# Altium PCB led_project.PcbDoc (part 1 of 2)
Units mm, origin at the board's own origin, x right, y up, seen from the top; angles counter-clockwise.
Board outline 347.39 x 342.47 mm, 2 copper layers (Top Layer 1, Bottom Layer 1); 228 components, 175 nets, 826 pads, 0 vias.
Unrouted connection lines stored in the file: 396.
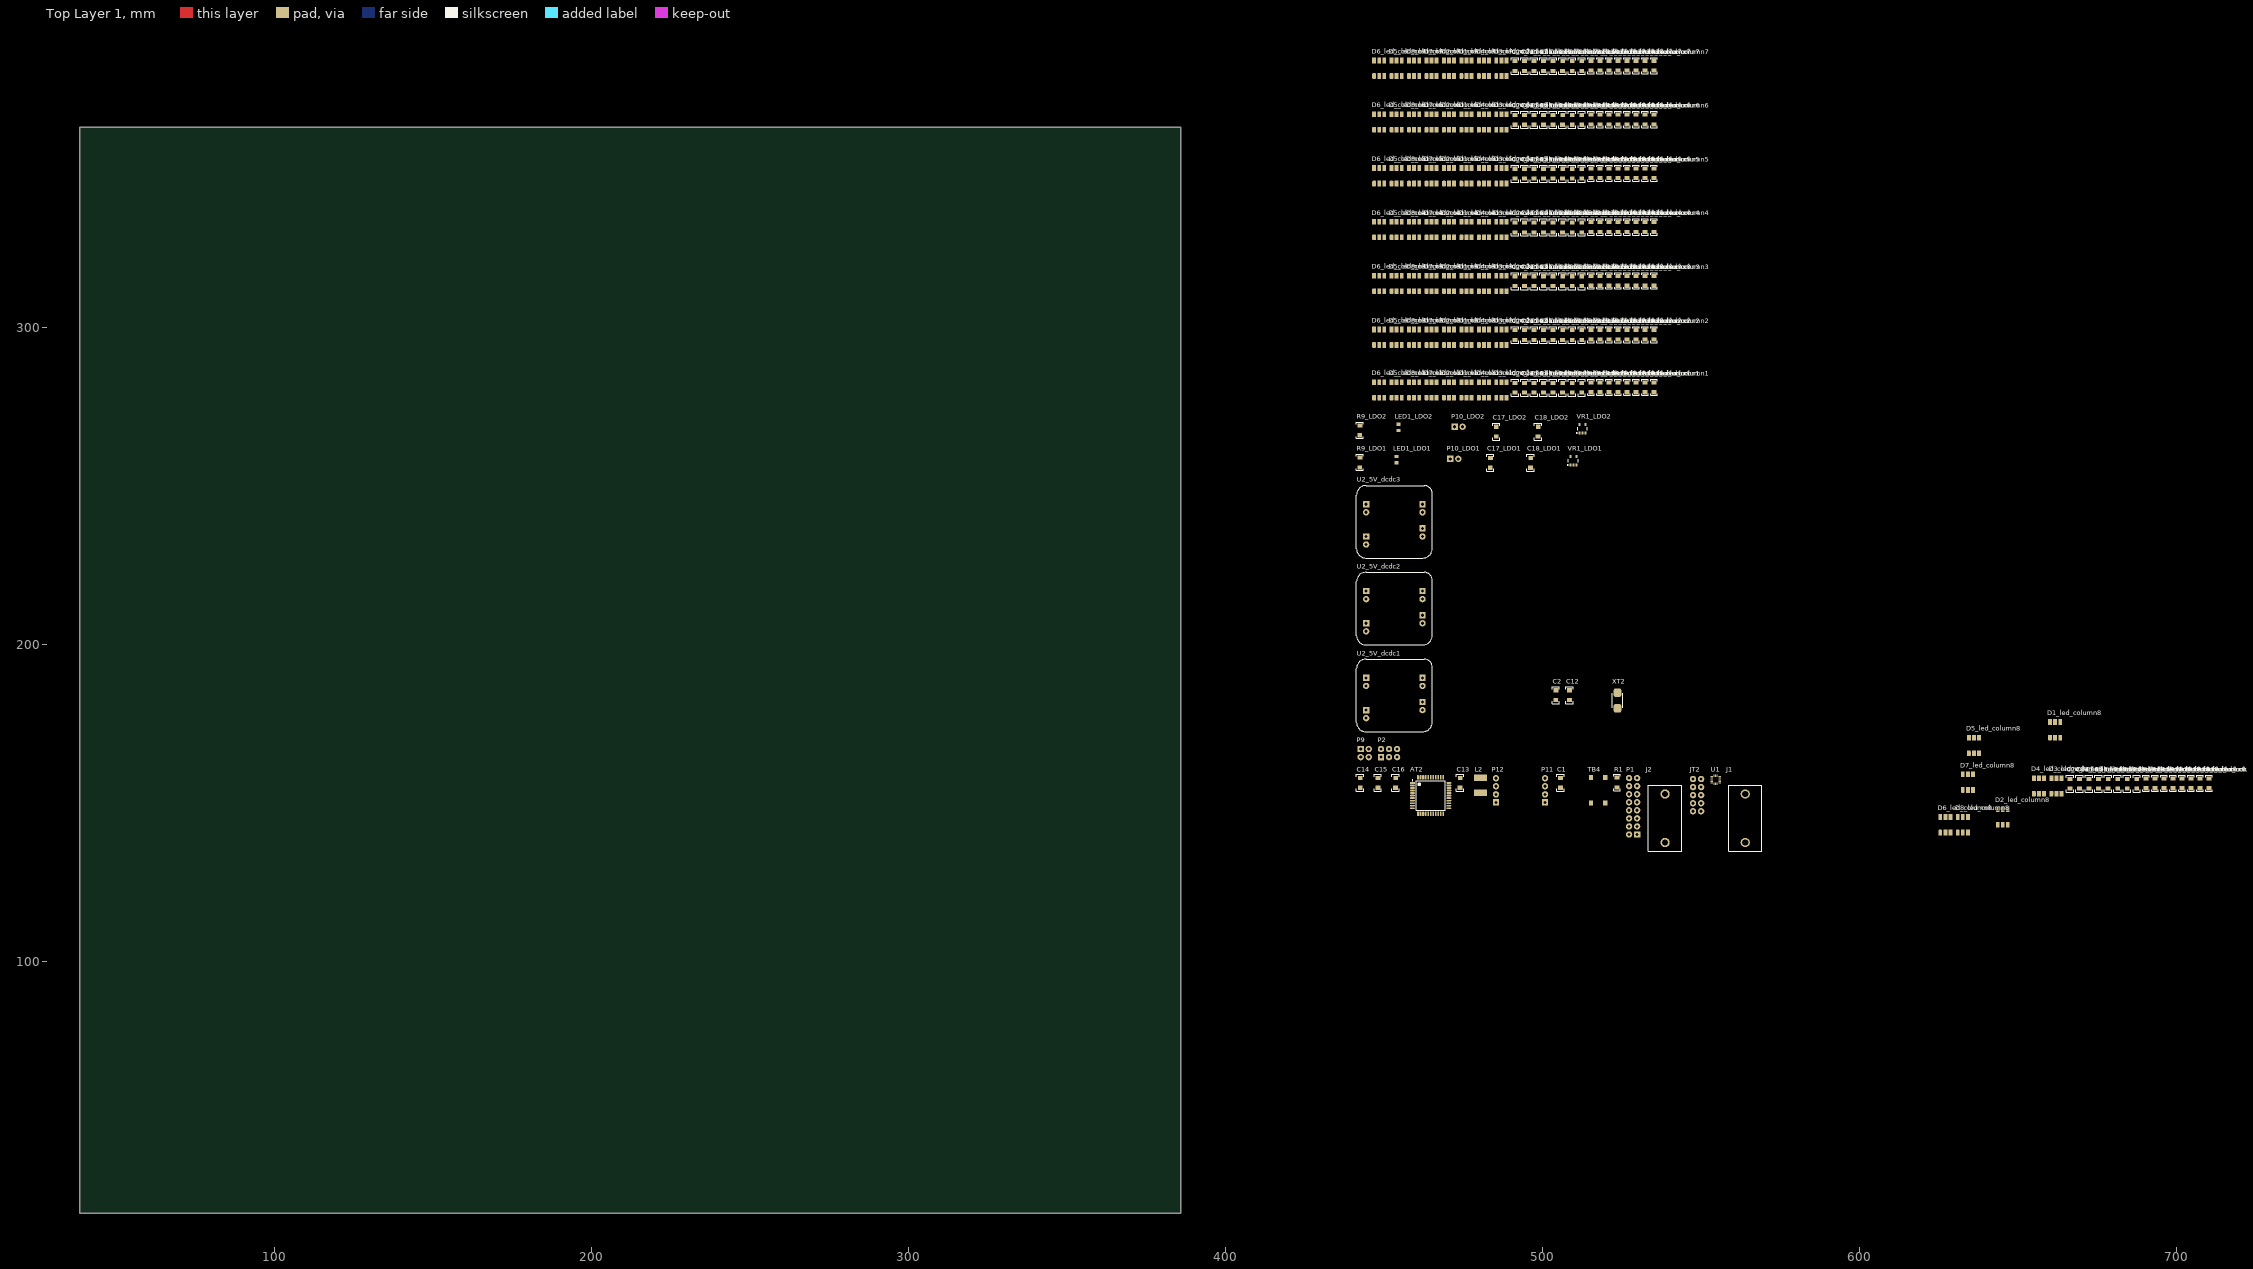
[diagram p0: Top Layer 1 view]
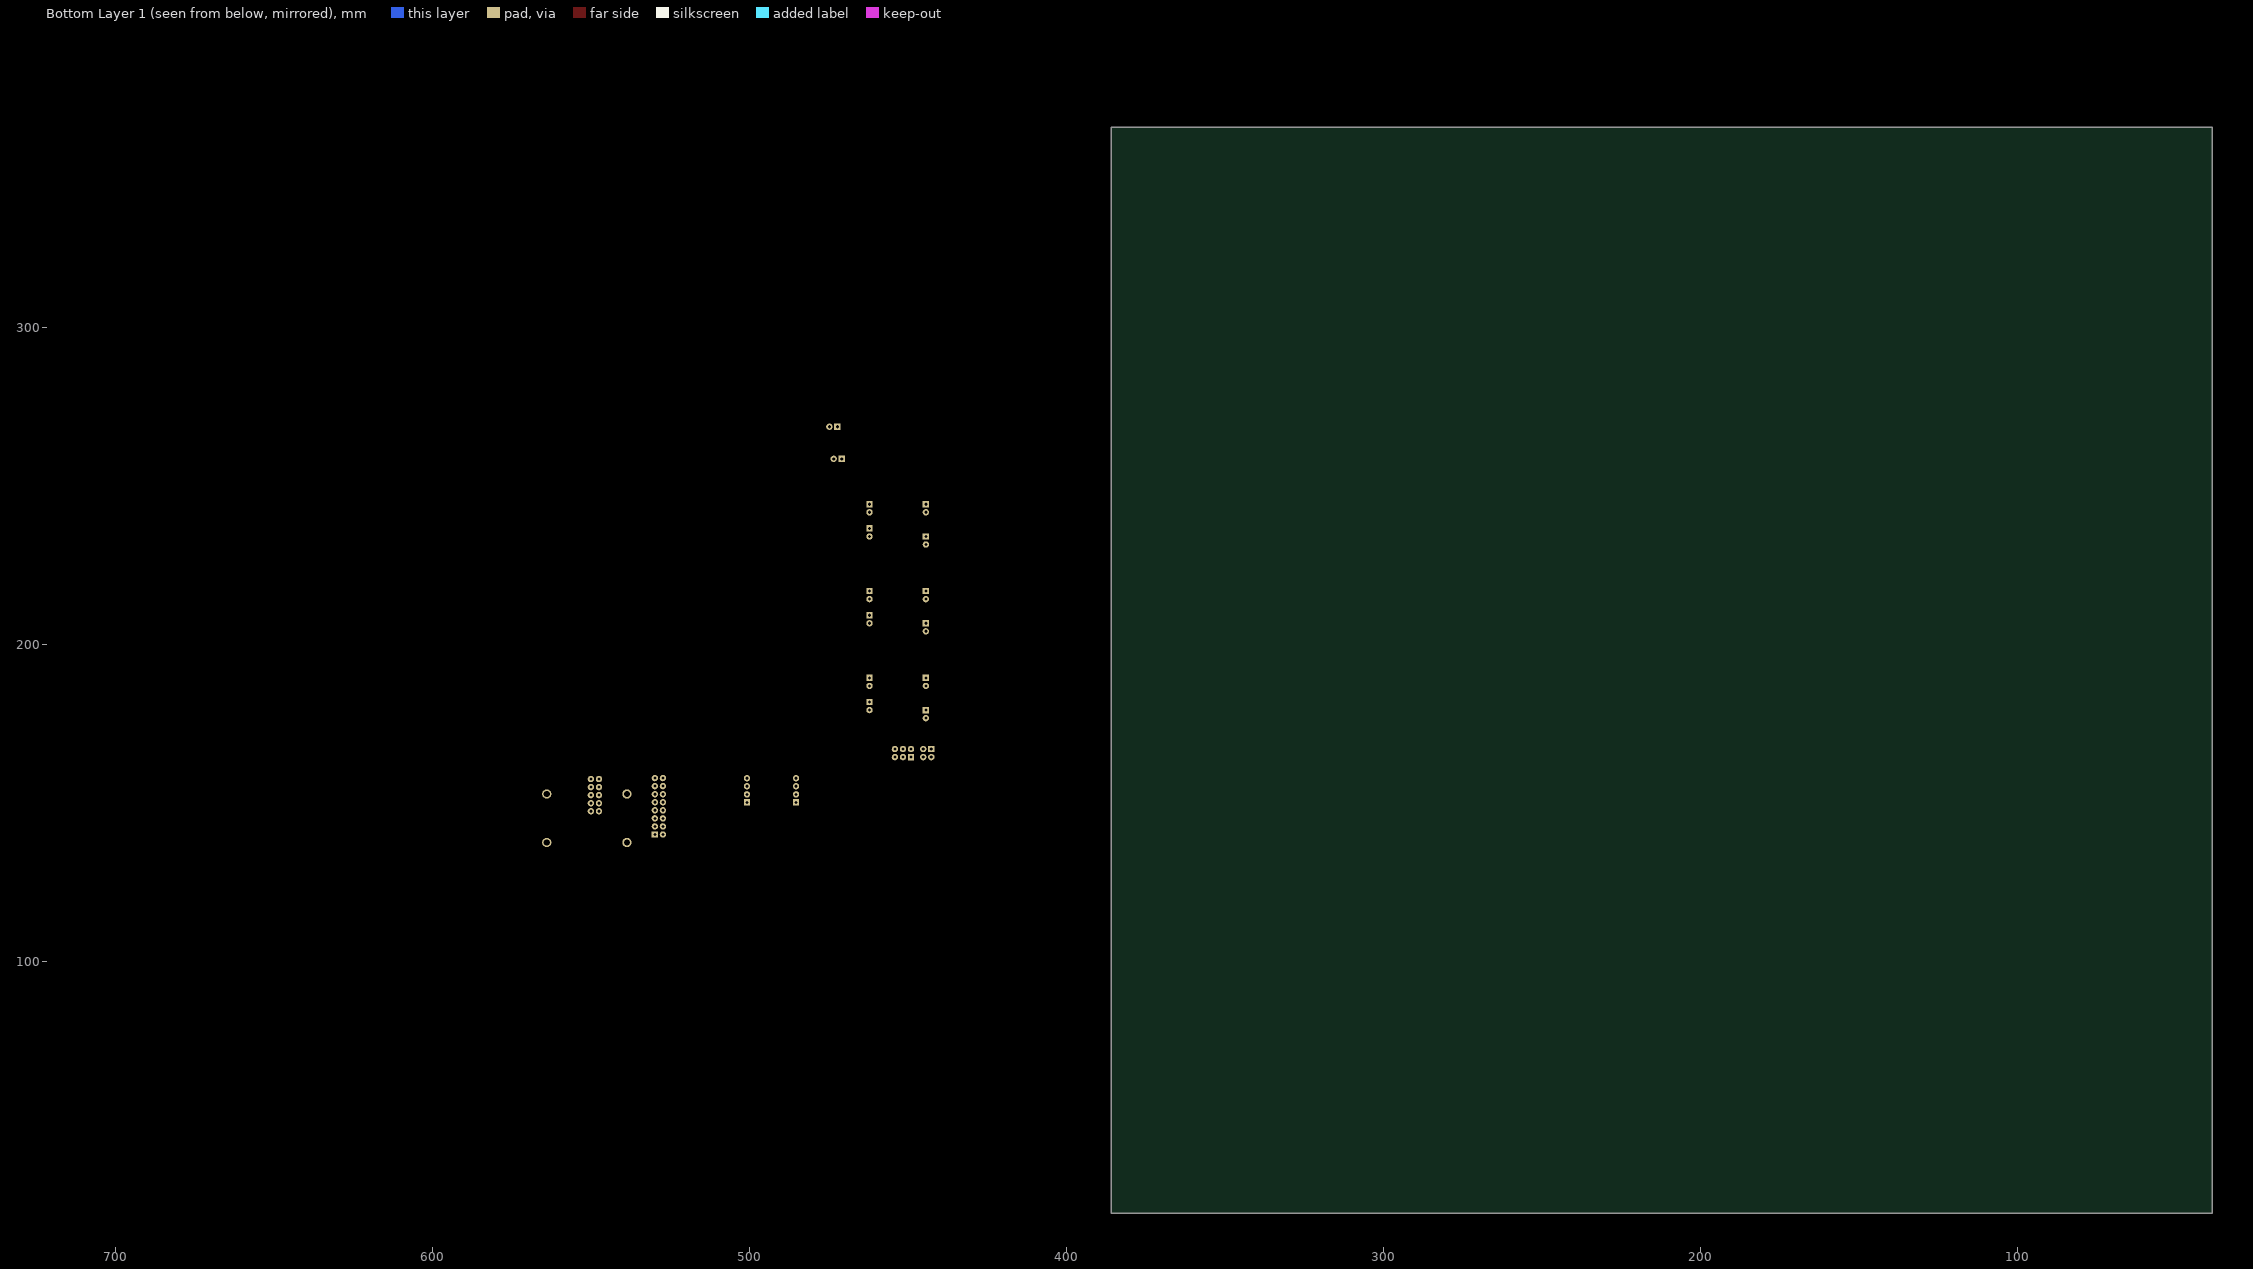
[diagram p1: Bottom Layer 1 view, seen from below]

## Layer stack, top to bottom
Top Solder: solder mask 0.0102, Solder Resist, Dk 3.5
Top Layer 1: signal copper 0.035
Dielectric 1: dielectric 0.32, FR-4, Dk 4.8
Bottom Layer 1: signal copper 0.035
Bottom Solder: solder mask 0.0102, Solder Resist, Dk 3.5

## Board outline
38.5,20.563 38.5,363 385.894,363 385.894,20.529 38.629,20.529

## Design rules (kind name [scope] priority, off if disabled: settings)
Clearance [All] p1: gap=0.25 ignorepadtopadclearanceinfootprint=FALSE except(0.001: Fill-Text Poly-Text Region-Text)
MinimumSolderMaskSliver [All] p1 off: minsoldermaskwidth=0.254
PolygonConnect PolygonConnect_1 [IsVia] p1: connectstyle=Direct reliefconductorwidth=0.254 reliefentries=4 polygonreliefangle="90 Angle" airgapwidth=0.254
PolygonConnect [All] p2: connectstyle=Relief reliefconductorwidth=0.254 reliefentries=4 polygonreliefangle="90 Angle" airgapwidth=0.254
RoomDefinition U_pwr_supply [InComponentClass('U_pwr_supply')] p1: confinementstyle=ConfineIn formatcopy=TRUE lockcomponents=FALSE outline 441.014,162.902 455.467,162.902 455.467,170.89 441.014,170.89
RoomDefinition led_column8 [InComponentClass('led_column8')] p2: confinementstyle=ConfineIn formatcopy=TRUE lockcomponents=FALSE outline 621.5,123.584 720.915,123.584 720.915,184.429 621.5,184.429
RoomDefinition led_column7 [InComponentClass('led_column7')] p3: confinementstyle=ConfineIn formatcopy=TRUE lockcomponents=FALSE outline 441.014,375.729 545.853,375.729 545.853,390.41 441.014,390.41
RoomDefinition led_column6 [InComponentClass('led_column6')] p4: confinementstyle=ConfineIn formatcopy=TRUE lockcomponents=FALSE outline 441.014,358.761 545.853,358.761 545.853,373.443 441.014,373.443
RoomDefinition led_column5 [InComponentClass('led_column5')] p5: confinementstyle=ConfineIn formatcopy=TRUE lockcomponents=FALSE outline 441.014,341.794 545.853,341.794 545.853,356.475 441.014,356.475
RoomDefinition led_column4 [InComponentClass('led_column4')] p6: confinementstyle=ConfineIn formatcopy=TRUE lockcomponents=FALSE outline 441.014,324.827 545.853,324.827 545.853,339.508 441.014,339.508
RoomDefinition led_column3 [InComponentClass('led_column3')] p7: confinementstyle=ConfineIn formatcopy=TRUE lockcomponents=FALSE outline 441.014,307.86 545.853,307.86 545.853,322.541 441.014,322.541
RoomDefinition led_column2 [InComponentClass('led_column2')] p8: confinementstyle=ConfineIn formatcopy=TRUE lockcomponents=FALSE outline 441.014,290.893 545.853,290.893 545.853,305.574 441.014,305.574
RoomDefinition led_column1 [InComponentClass('led_column1')] p9: confinementstyle=ConfineIn formatcopy=TRUE lockcomponents=FALSE outline 441.014,274.256 545.853,274.256 545.853,288.937 441.014,288.937
RoomDefinition LDO2 [InComponentClass('LDO2')] p10: confinementstyle=ConfineIn formatcopy=TRUE lockcomponents=FALSE outline 441.014,264.121 522.536,264.121 522.536,272.986 441.014,272.986
RoomDefinition LDO1 [InComponentClass('LDO1')] p11: confinementstyle=ConfineIn formatcopy=TRUE lockcomponents=FALSE outline 441.014,254.304 519.157,254.304 519.157,262.851 441.014,262.851
RoutingVias [All] p1: holewidth=0.4 width=0.6 viastyle="Through Hole" minholewidth=0.4 minwidth=0.6 maxholewidth=0.4 maxwidth=0.6
SilkToSilkClearance [All] p1 off: silktosilkclearance=0.254
SilkToSolderMaskClearance [IsPad] p1 off: minsilkscreentomaskgap=0.254 clearancetoexposedcopper=TRUE
SolderMaskExpansion [All] p1: expansion=0.102 istentingtop=FALSE
Width [All] p1: maxlimit=1 minlimit=0.3 preferedwidth=0.55
27 further rules are at their usual default settings.

## Classes and differential pairs
channel class ws2812_column: led_column1 led_column2 led_column3 led_column4 led_column5 led_column6 led_column7 led_column8
channel class tps79333: LDO1 LDO2
channel class tps61202: 5V_dcdc1 5V_dcdc2 5V_dcdc3
net class Din[1..8]: Din1 Din2 Din3 Din4 Din5 Din6 Din7 Din8
net class 5Vout[1..3]: 5Vout1 5Vout2 5Vout3
net class 5V_led[1..3]: 5V_led1 5V_led2 5V_led3
net class 3V3out[1..2]: 3V3out1 3V3out2
component class U_pwr_supply: P2 P9
component class LEDeep_project: AT2 C1 C2 C12 C13 C14 C15 C16 J1 J2 JT2 L2 P1 P11 P12 R1 TB4 U1 XT2
component class led_column8: C19_led_column8 C20_led_column8 C21_led_column8 C22_led_column8 C23_led_column8 C24_led_column8 C25_led_column8 C26_led_column8 D1_led_column8 D2_led_column8 D3_led_column8 D4_led_column8 D5_led_column8 D6_led_column8 D7_led_column8 D8_led_column8 R10_led_column8 R11_led_column8 R12_led_column8 R13_led_column8 R14_led_column8 R15_led_column8 R16_led_column8 R17_led_column8
component class led_column7: C19_led_column7 C20_led_column7 C21_led_column7 C22_led_column7 C23_led_column7 C24_led_column7 C25_led_column7 C26_led_column7 D1_led_column7 D2_led_column7 D3_led_column7 D4_led_column7 D5_led_column7 D6_led_column7 D7_led_column7 D8_led_column7 R10_led_column7 R11_led_column7 R12_led_column7 R13_led_column7 R14_led_column7 R15_led_column7 R16_led_column7 R17_led_column7
component class led_column6: C19_led_column6 C20_led_column6 C21_led_column6 C22_led_column6 C23_led_column6 C24_led_column6 C25_led_column6 C26_led_column6 D1_led_column6 D2_led_column6 D3_led_column6 D4_led_column6 D5_led_column6 D6_led_column6 D7_led_column6 D8_led_column6 R10_led_column6 R11_led_column6 R12_led_column6 R13_led_column6 R14_led_column6 R15_led_column6 R16_led_column6 R17_led_column6
component class led_column5: C19_led_column5 C20_led_column5 C21_led_column5 C22_led_column5 C23_led_column5 C24_led_column5 C25_led_column5 C26_led_column5 D1_led_column5 D2_led_column5 D3_led_column5 D4_led_column5 D5_led_column5 D6_led_column5 D7_led_column5 D8_led_column5 R10_led_column5 R11_led_column5 R12_led_column5 R13_led_column5 R14_led_column5 R15_led_column5 R16_led_column5 R17_led_column5
component class led_column4: C19_led_column4 C20_led_column4 C21_led_column4 C22_led_column4 C23_led_column4 C24_led_column4 C25_led_column4 C26_led_column4 D1_led_column4 D2_led_column4 D3_led_column4 D4_led_column4 D5_led_column4 D6_led_column4 D7_led_column4 D8_led_column4 R10_led_column4 R11_led_column4 R12_led_column4 R13_led_column4 R14_led_column4 R15_led_column4 R16_led_column4 R17_led_column4
component class led_column3: C19_led_column3 C20_led_column3 C21_led_column3 C22_led_column3 C23_led_column3 C24_led_column3 C25_led_column3 C26_led_column3 D1_led_column3 D2_led_column3 D3_led_column3 D4_led_column3 D5_led_column3 D6_led_column3 D7_led_column3 D8_led_column3 R10_led_column3 R11_led_column3 R12_led_column3 R13_led_column3 R14_led_column3 R15_led_column3 R16_led_column3 R17_led_column3
component class led_column2: C19_led_column2 C20_led_column2 C21_led_column2 C22_led_column2 C23_led_column2 C24_led_column2 C25_led_column2 C26_led_column2 D1_led_column2 D2_led_column2 D3_led_column2 D4_led_column2 D5_led_column2 D6_led_column2 D7_led_column2 D8_led_column2 R10_led_column2 R11_led_column2 R12_led_column2 R13_led_column2 R14_led_column2 R15_led_column2 R16_led_column2 R17_led_column2
component class led_column1: C19_led_column1 C20_led_column1 C21_led_column1 C22_led_column1 C23_led_column1 C24_led_column1 C25_led_column1 C26_led_column1 D1_led_column1 D2_led_column1 D3_led_column1 D4_led_column1 D5_led_column1 D6_led_column1 D7_led_column1 D8_led_column1 R10_led_column1 R11_led_column1 R12_led_column1 R13_led_column1 R14_led_column1 R15_led_column1 R16_led_column1 R17_led_column1
component class LDO2: C17_LDO2 C18_LDO2 LED1_LDO2 P10_LDO2 R9_LDO2 VR1_LDO2
component class LDO1: C17_LDO1 C18_LDO1 LED1_LDO1 P10_LDO1 R9_LDO1 VR1_LDO1
component class 5V_dcdc3: U2_5V_dcdc3
component class 5V_dcdc2: U2_5V_dcdc2
component class 5V_dcdc1: U2_5V_dcdc1

## Components (designator, comment, footprint, x,y, rotation, side; value= is the part's Value field where it differs from the comment)
AT2 "ATmega644PA" TQFP-44 464.649,152.221 r0 top
C1 "1206, capacitor" "1206, capasitor" 505.607,158.343 r90 top value=100n
C2 "1206, capacitor" "1206, capasitor" 504.171,186.029 r90 top value=10-12p
C12 "1206, capacitor" "1206, capasitor" 508.489,186.029 r90 top value=10-12p
C13 "1206, capacitor" "1206, capasitor" 473.971,158.343 r90 top value=100n
C14 "1206, capacitor" "1206, capasitor" 442.449,158.343 r90 top value=100n
C15 "1206, capacitor" "1206, capasitor" 448.037,158.343 r90 top value=100n
C16 "1206, capacitor" "1206, capasitor" 453.625,158.343 r90 top value=100n
C17_LDO1 "1206, capacitor" "1206, capasitor" 483.509,259.308 r90 top value=100n (schematic designator C17)
C17_LDO2 "1206, capacitor" "1206, capasitor" 485.363,269.125 r90 top value=100n (schematic designator C17)
C18_LDO1 "1206, capacitor" "1206, capasitor" 496.209,259.308 r90 top value=10u (schematic designator C18)
C18_LDO2 "1206, capacitor" "1206, capasitor" 498.571,269.125 r90 top value=10u (schematic designator C18)
C19_led_column1 "1206, capacitor" "1206, capasitor" 506.308,282.982 r90 top value=0 (schematic designator C19)
C19_led_column2 "1206, capacitor" "1206, capasitor" 506.308,299.619 r90 top value=0 (schematic designator C19)
C19_led_column3 "1206, capacitor" "1206, capasitor" 506.308,316.586 r90 top value=0 (schematic designator C19)
C19_led_column4 "1206, capacitor" "1206, capasitor" 506.308,333.553 r90 top value=0 (schematic designator C19)
C19_led_column5 "1206, capacitor" "1206, capasitor" 506.308,350.521 r90 top value=0 (schematic designator C19)
C19_led_column6 "1206, capacitor" "1206, capasitor" 506.308,367.488 r90 top value=0 (schematic designator C19)
C19_led_column7 "1206, capacitor" "1206, capasitor" 506.308,384.455 r90 top value=0 (schematic designator C19)
C19_led_column8 "1206, capacitor" "1206, capasitor" 681.371,158.079 r90 top value=0 (schematic designator C19)
C20_led_column1 "1206, capacitor" "1206, capasitor" 503.3,282.982 r90 top value=0 (schematic designator C20)
C20_led_column2 "1206, capacitor" "1206, capasitor" 503.3,299.619 r90 top value=0 (schematic designator C20)
C20_led_column3 "1206, capacitor" "1206, capasitor" 503.3,316.586 r90 top value=0 (schematic designator C20)
C20_led_column4 "1206, capacitor" "1206, capasitor" 503.3,333.553 r90 top value=0 (schematic designator C20)
C20_led_column5 "1206, capacitor" "1206, capasitor" 503.3,350.521 r90 top value=0 (schematic designator C20)
C20_led_column6 "1206, capacitor" "1206, capasitor" 503.3,367.488 r90 top value=0 (schematic designator C20)
C20_led_column7 "1206, capacitor" "1206, capasitor" 503.3,384.455 r90 top value=0 (schematic designator C20)
C20_led_column8 "1206, capacitor" "1206, capasitor" 678.363,158.079 r90 top value=0 (schematic designator C20)
C21_led_column1 "1206, capacitor" "1206, capasitor" 512.324,282.982 r90 top value=0 (schematic designator C21)
C21_led_column2 "1206, capacitor" "1206, capasitor" 512.324,299.619 r90 top value=0 (schematic designator C21)
C21_led_column3 "1206, capacitor" "1206, capasitor" 512.324,316.586 r90 top value=0 (schematic designator C21)
C21_led_column4 "1206, capacitor" "1206, capasitor" 512.324,333.553 r90 top value=0 (schematic designator C21)
C21_led_column5 "1206, capacitor" "1206, capasitor" 512.324,350.521 r90 top value=0 (schematic designator C21)
C21_led_column6 "1206, capacitor" "1206, capasitor" 512.324,367.488 r90 top value=0 (schematic designator C21)
C21_led_column7 "1206, capacitor" "1206, capasitor" 512.324,384.455 r90 top value=0 (schematic designator C21)
C21_led_column8 "1206, capacitor" "1206, capasitor" 687.387,158.079 r90 top value=0 (schematic designator C21)
C22_led_column1 "1206, capacitor" "1206, capasitor" 509.316,282.982 r90 top value=0 (schematic designator C22)
C22_led_column2 "1206, capacitor" "1206, capasitor" 509.316,299.619 r90 top value=0 (schematic designator C22)
C22_led_column3 "1206, capacitor" "1206, capasitor" 509.316,316.586 r90 top value=0 (schematic designator C22)
C22_led_column4 "1206, capacitor" "1206, capasitor" 509.316,333.553 r90 top value=0 (schematic designator C22)
C22_led_column5 "1206, capacitor" "1206, capasitor" 509.316,350.521 r90 top value=0 (schematic designator C22)
C22_led_column6 "1206, capacitor" "1206, capasitor" 509.316,367.488 r90 top value=0 (schematic designator C22)
C22_led_column7 "1206, capacitor" "1206, capasitor" 509.316,384.455 r90 top value=0 (schematic designator C22)
C22_led_column8 "1206, capacitor" "1206, capasitor" 684.379,158.079 r90 top value=0 (schematic designator C22)
C23_led_column1 "1206, capacitor" "1206, capasitor" 494.276,282.982 r90 top value=0 (schematic designator C23)
C23_led_column2 "1206, capacitor" "1206, capasitor" 494.276,299.619 r90 top value=0 (schematic designator C23)
C23_led_column3 "1206, capacitor" "1206, capasitor" 494.276,316.586 r90 top value=0 (schematic designator C23)
C23_led_column4 "1206, capacitor" "1206, capasitor" 494.276,333.553 r90 top value=0 (schematic designator C23)
C23_led_column5 "1206, capacitor" "1206, capasitor" 494.276,350.521 r90 top value=0 (schematic designator C23)
C23_led_column6 "1206, capacitor" "1206, capasitor" 494.276,367.488 r90 top value=0 (schematic designator C23)
C23_led_column7 "1206, capacitor" "1206, capasitor" 494.276,384.455 r90 top value=0 (schematic designator C23)
C23_led_column8 "1206, capacitor" "1206, capasitor" 669.339,158.079 r90 top value=0 (schematic designator C23)
C24_led_column1 "1206, capacitor" "1206, capasitor" 491.268,282.982 r90 top value=0 (schematic designator C24)
C24_led_column2 "1206, capacitor" "1206, capasitor" 491.268,299.619 r90 top value=0 (schematic designator C24)
C24_led_column3 "1206, capacitor" "1206, capasitor" 491.268,316.586 r90 top value=0 (schematic designator C24)
C24_led_column4 "1206, capacitor" "1206, capasitor" 491.268,333.553 r90 top value=0 (schematic designator C24)
C24_led_column5 "1206, capacitor" "1206, capasitor" 491.268,350.521 r90 top value=0 (schematic designator C24)
C24_led_column6 "1206, capacitor" "1206, capasitor" 491.268,367.488 r90 top value=0 (schematic designator C24)
C24_led_column7 "1206, capacitor" "1206, capasitor" 491.268,384.455 r90 top value=0 (schematic designator C24)
C24_led_column8 "1206, capacitor" "1206, capasitor" 666.331,158.079 r90 top value=0 (schematic designator C24)
C25_led_column1 "1206, capacitor" "1206, capasitor" 500.292,282.982 r90 top value=0 (schematic designator C25)
C25_led_column2 "1206, capacitor" "1206, capasitor" 500.292,299.619 r90 top value=0 (schematic designator C25)
C25_led_column3 "1206, capacitor" "1206, capasitor" 500.292,316.586 r90 top value=0 (schematic designator C25)
C25_led_column4 "1206, capacitor" "1206, capasitor" 500.292,333.553 r90 top value=0 (schematic designator C25)
C25_led_column5 "1206, capacitor" "1206, capasitor" 500.292,350.521 r90 top value=0 (schematic designator C25)
C25_led_column6 "1206, capacitor" "1206, capasitor" 500.292,367.488 r90 top value=0 (schematic designator C25)
C25_led_column7 "1206, capacitor" "1206, capasitor" 500.292,384.455 r90 top value=0 (schematic designator C25)
C25_led_column8 "1206, capacitor" "1206, capasitor" 675.355,158.079 r90 top value=0 (schematic designator C25)
C26_led_column1 "1206, capacitor" "1206, capasitor" 497.284,282.982 r90 top value=0 (schematic designator C26)
C26_led_column2 "1206, capacitor" "1206, capasitor" 497.284,299.619 r90 top value=0 (schematic designator C26)
C26_led_column3 "1206, capacitor" "1206, capasitor" 497.284,316.586 r90 top value=0 (schematic designator C26)
C26_led_column4 "1206, capacitor" "1206, capasitor" 497.284,333.553 r90 top value=0 (schematic designator C26)
C26_led_column5 "1206, capacitor" "1206, capasitor" 497.284,350.521 r90 top value=0 (schematic designator C26)
C26_led_column6 "1206, capacitor" "1206, capasitor" 497.284,367.488 r90 top value=0 (schematic designator C26)
C26_led_column7 "1206, capacitor" "1206, capasitor" 497.284,384.455 r90 top value=0 (schematic designator C26)
C26_led_column8 "1206, capacitor" "1206, capasitor" 672.347,158.079 r90 top value=0 (schematic designator C26)
D1_led_column1 "Neo - WS2812" NEOPIXEL 475.944,280.164 r90 top value=WS2812 (schematic designator D1)
D1_led_column2 "Neo - WS2812" NEOPIXEL 475.944,296.801 r90 top value=WS2812 (schematic designator D1)
D1_led_column3 "Neo - WS2812" NEOPIXEL 475.944,313.768 r90 top value=WS2812 (schematic designator D1)
D1_led_column4 "Neo - WS2812" NEOPIXEL 475.944,330.735 r90 top value=WS2812 (schematic designator D1)
D1_led_column5 "Neo - WS2812" NEOPIXEL 475.944,347.702 r90 top value=WS2812 (schematic designator D1)
D1_led_column6 "Neo - WS2812" NEOPIXEL 475.944,364.67 r90 top value=WS2812 (schematic designator D1)
D1_led_column7 "Neo - WS2812" NEOPIXEL 475.944,381.637 r90 top value=WS2812 (schematic designator D1)
D1_led_column8 "Neo - WS2812" NEOPIXEL 661.6,172.95 r90 top value=WS2812 (schematic designator D1)
D2_led_column1 "Neo - WS2812" NEOPIXEL 470.436,280.164 r90 top value=WS2812 (schematic designator D2)
D2_led_column2 "Neo - WS2812" NEOPIXEL 470.436,296.801 r90 top value=WS2812 (schematic designator D2)
D2_led_column3 "Neo - WS2812" NEOPIXEL 470.436,313.768 r90 top value=WS2812 (schematic designator D2)
D2_led_column4 "Neo - WS2812" NEOPIXEL 470.436,330.735 r90 top value=WS2812 (schematic designator D2)
D2_led_column5 "Neo - WS2812" NEOPIXEL 470.436,347.702 r90 top value=WS2812 (schematic designator D2)
D2_led_column6 "Neo - WS2812" NEOPIXEL 470.436,364.67 r90 top value=WS2812 (schematic designator D2)
D2_led_column7 "Neo - WS2812" NEOPIXEL 470.436,381.637 r90 top value=WS2812 (schematic designator D2)
D2_led_column8 "Neo - WS2812" NEOPIXEL 645.1,145.45 r90 top value=WS2812 (schematic designator D2)
D3_led_column1 "Neo - WS2812" NEOPIXEL 486.96,280.164 r90 top value=WS2812 (schematic designator D3)
D3_led_column2 "Neo - WS2812" NEOPIXEL 486.96,296.801 r90 top value=WS2812 (schematic designator D3)
D3_led_column3 "Neo - WS2812" NEOPIXEL 486.96,313.768 r90 top value=WS2812 (schematic designator D3)
D3_led_column4 "Neo - WS2812" NEOPIXEL 486.96,330.735 r90 top value=WS2812 (schematic designator D3)
D3_led_column5 "Neo - WS2812" NEOPIXEL 486.96,347.702 r90 top value=WS2812 (schematic designator D3)
D3_led_column6 "Neo - WS2812" NEOPIXEL 486.96,364.67 r90 top value=WS2812 (schematic designator D3)
D3_led_column7 "Neo - WS2812" NEOPIXEL 486.96,381.637 r90 top value=WS2812 (schematic designator D3)
D3_led_column8 "Neo - WS2812" NEOPIXEL 662.023,155.26 r90 top value=WS2812 (schematic designator D3)
D4_led_column1 "Neo - WS2812" NEOPIXEL 481.452,280.164 r90 top value=WS2812 (schematic designator D4)
D4_led_column2 "Neo - WS2812" NEOPIXEL 481.452,296.801 r90 top value=WS2812 (schematic designator D4)
D4_led_column3 "Neo - WS2812" NEOPIXEL 481.452,313.768 r90 top value=WS2812 (schematic designator D4)
D4_led_column4 "Neo - WS2812" NEOPIXEL 481.452,330.735 r90 top value=WS2812 (schematic designator D4)
D4_led_column5 "Neo - WS2812" NEOPIXEL 481.452,347.702 r90 top value=WS2812 (schematic designator D4)
D4_led_column6 "Neo - WS2812" NEOPIXEL 481.452,364.67 r90 top value=WS2812 (schematic designator D4)
D4_led_column7 "Neo - WS2812" NEOPIXEL 481.452,381.637 r90 top value=WS2812 (schematic designator D4)
D4_led_column8 "Neo - WS2812" NEOPIXEL 656.515,155.26 r90 top value=WS2812 (schematic designator D4)
D5_led_column1 "Neo - WS2812" NEOPIXEL 453.912,280.164 r90 top value=WS2812 (schematic designator D5)
D5_led_column2 "Neo - WS2812" NEOPIXEL 453.912,296.801 r90 top value=WS2812 (schematic designator D5)
D5_led_column3 "Neo - WS2812" NEOPIXEL 453.912,313.768 r90 top value=WS2812 (schematic designator D5)
D5_led_column4 "Neo - WS2812" NEOPIXEL 453.912,330.735 r90 top value=WS2812 (schematic designator D5)
D5_led_column5 "Neo - WS2812" NEOPIXEL 453.912,347.702 r90 top value=WS2812 (schematic designator D5)
D5_led_column6 "Neo - WS2812" NEOPIXEL 453.912,364.67 r90 top value=WS2812 (schematic designator D5)
D5_led_column7 "Neo - WS2812" NEOPIXEL 453.912,381.637 r90 top value=WS2812 (schematic designator D5)
D5_led_column8 "Neo - WS2812" NEOPIXEL 636,168 r90 top value=WS2812 (schematic designator D5)
D6_led_column1 "Neo - WS2812" NEOPIXEL 448.404,280.164 r90 top value=WS2812 (schematic designator D6)
D6_led_column2 "Neo - WS2812" NEOPIXEL 448.404,296.801 r90 top value=WS2812 (schematic designator D6)
D6_led_column3 "Neo - WS2812" NEOPIXEL 448.404,313.768 r90 top value=WS2812 (schematic designator D6)
D6_led_column4 "Neo - WS2812" NEOPIXEL 448.404,330.735 r90 top value=WS2812 (schematic designator D6)
D6_led_column5 "Neo - WS2812" NEOPIXEL 448.404,347.702 r90 top value=WS2812 (schematic designator D6)
D6_led_column6 "Neo - WS2812" NEOPIXEL 448.404,364.67 r90 top value=WS2812 (schematic designator D6)
D6_led_column7 "Neo - WS2812" NEOPIXEL 448.404,381.637 r90 top value=WS2812 (schematic designator D6)
D6_led_column8 "Neo - WS2812" NEOPIXEL 627,143 r90 top value=WS2812 (schematic designator D6)
D7_led_column1 "Neo - WS2812" NEOPIXEL 464.928,280.164 r90 top value=WS2812 (schematic designator D7)
D7_led_column2 "Neo - WS2812" NEOPIXEL 464.928,296.801 r90 top value=WS2812 (schematic designator D7)
D7_led_column3 "Neo - WS2812" NEOPIXEL 464.928,313.768 r90 top value=WS2812 (schematic designator D7)
D7_led_column4 "Neo - WS2812" NEOPIXEL 464.928,330.735 r90 top value=WS2812 (schematic designator D7)
D7_led_column5 "Neo - WS2812" NEOPIXEL 464.928,347.702 r90 top value=WS2812 (schematic designator D7)
D7_led_column6 "Neo - WS2812" NEOPIXEL 464.928,364.67 r90 top value=WS2812 (schematic designator D7)
D7_led_column7 "Neo - WS2812" NEOPIXEL 464.928,381.637 r90 top value=WS2812 (schematic designator D7)
D7_led_column8 "Neo - WS2812" NEOPIXEL 634.1,156.45 r90 top value=WS2812 (schematic designator D7)
D8_led_column1 "Neo - WS2812" NEOPIXEL 459.42,280.164 r90 top value=WS2812 (schematic designator D8)
D8_led_column2 "Neo - WS2812" NEOPIXEL 459.42,296.801 r90 top value=WS2812 (schematic designator D8)
D8_led_column3 "Neo - WS2812" NEOPIXEL 459.42,313.768 r90 top value=WS2812 (schematic designator D8)
D8_led_column4 "Neo - WS2812" NEOPIXEL 459.42,330.735 r90 top value=WS2812 (schematic designator D8)
D8_led_column5 "Neo - WS2812" NEOPIXEL 459.42,347.702 r90 top value=WS2812 (schematic designator D8)
D8_led_column6 "Neo - WS2812" NEOPIXEL 459.42,364.67 r90 top value=WS2812 (schematic designator D8)
D8_led_column7 "Neo - WS2812" NEOPIXEL 459.42,381.637 r90 top value=WS2812 (schematic designator D8)
D8_led_column8 "Neo - WS2812" NEOPIXEL 632.5,143 r90 top value=WS2812 (schematic designator D8)
J1 "571-0100" "Banana Conn VCC" 563.874,137.413 r90 top
J2 "571-0100" "Banana Conn VCC" 538.601,137.413 r90 top
JT2 "JTAG Connector" Atmel_JTAG 549.942,147.243 r90 top
L2 "Coil" "1812, coil" 480.359,155.472 r90 top value=10u
LED1_LDO1 "0805, LED" 0805_led 453.956,258.215 r90 top value="0805 LED" (schematic designator LED1)
LED1_LDO2 "0805, LED" 0805_led 454.464,268.35 r90 top value="0805 LED" (schematic designator LED1)
P1 "2x8 Pin Header" "2x8 Pin Header" 529.775,157.733 r90 top value="1x8 Pin Header"
P2 "2x3 Pin Header" "2x3 PH" 448.977,164.35 r0 top value="2x3 Pin Header, 2.54mm"
P9 "2x2 Pin Header" "2x2 PH" 442.576,166.89 r0 top value="2x2 Pin Header, 2.54mm"
P10_LDO1 "1x2 Pin Header" 1x2HEADER 470.834,258.419 r90 top (schematic designator P10)
P10_LDO2 "1x2 Pin Header" 1x2HEADER 472.193,268.553 r90 top (schematic designator P10)
P11 "4x1 Pin Header" padFour_L 500.73,153.898 r90 top
P12 "4x1 Pin Header" padFour_L 485.236,153.898 r90 top
R1 "1206, resistor" 1206 523.399,158.165 r90 top value=10k
R9_LDO1 "1206, resistor" 1206 442.31,259.13 r90 top value=0 (schematic designator R9)
R9_LDO2 "1206, resistor" 1206 442.31,269.264 r90 top value=0 (schematic designator R9)
R10_led_column1 "1206, resistor" 1206 520.882,282.804 r90 top value=150 (schematic designator R10)
R10_led_column2 "1206, resistor" 1206 520.882,299.441 r90 top value=150 (schematic designator R10)
R10_led_column3 "1206, resistor" 1206 520.882,316.408 r90 top value=150 (schematic designator R10)
R10_led_column4 "1206, resistor" 1206 520.882,333.376 r90 top value=150 (schematic designator R10)
R10_led_column5 "1206, resistor" 1206 520.882,350.343 r90 top value=150 (schematic designator R10)
R10_led_column6 "1206, resistor" 1206 520.882,367.31 r90 top value=150 (schematic designator R10)
R10_led_column7 "1206, resistor" 1206 520.882,384.277 r90 top value=150 (schematic designator R10)
R10_led_column8 "1206, resistor" 1206 695.945,157.901 r90 top value=150 (schematic designator R10)
R11_led_column1 "1206, resistor" 1206 523.724,282.804 r90 top value=150 (schematic designator R11)
R11_led_column2 "1206, resistor" 1206 523.724,299.441 r90 top value=150 (schematic designator R11)
R11_led_column3 "1206, resistor" 1206 523.724,316.408 r90 top value=150 (schematic designator R11)
R11_led_column4 "1206, resistor" 1206 523.724,333.376 r90 top value=150 (schematic designator R11)
R11_led_column5 "1206, resistor" 1206 523.724,350.343 r90 top value=150 (schematic designator R11)
R11_led_column6 "1206, resistor" 1206 523.724,367.31 r90 top value=150 (schematic designator R11)
R11_led_column7 "1206, resistor" 1206 523.724,384.277 r90 top value=150 (schematic designator R11)
R11_led_column8 "1206, resistor" 1206 698.786,157.901 r90 top value=150 (schematic designator R11)
R12_led_column1 "1206, resistor" 1206 515.199,282.804 r90 top value=150 (schematic designator R12)
R12_led_column2 "1206, resistor" 1206 515.199,299.441 r90 top value=150 (schematic designator R12)
R12_led_column3 "1206, resistor" 1206 515.199,316.408 r90 top value=150 (schematic designator R12)
R12_led_column4 "1206, resistor" 1206 515.199,333.376 r90 top value=150 (schematic designator R12)
R12_led_column5 "1206, resistor" 1206 515.199,350.343 r90 top value=150 (schematic designator R12)
R12_led_column6 "1206, resistor" 1206 515.199,367.31 r90 top value=150 (schematic designator R12)
R12_led_column7 "1206, resistor" 1206 515.199,384.277 r90 top value=150 (schematic designator R12)
R12_led_column8 "1206, resistor" 1206 690.261,157.901 r90 top value=150 (schematic designator R12)
R13_led_column1 "1206, resistor" 1206 518.04,282.804 r90 top value=150 (schematic designator R13)
R13_led_column2 "1206, resistor" 1206 518.04,299.441 r90 top value=150 (schematic designator R13)
R13_led_column3 "1206, resistor" 1206 518.04,316.408 r90 top value=150 (schematic designator R13)
R13_led_column4 "1206, resistor" 1206 518.04,333.376 r90 top value=150 (schematic designator R13)
R13_led_column5 "1206, resistor" 1206 518.04,350.343 r90 top value=150 (schematic designator R13)
R13_led_column6 "1206, resistor" 1206 518.04,367.31 r90 top value=150 (schematic designator R13)
R13_led_column7 "1206, resistor" 1206 518.04,384.277 r90 top value=150 (schematic designator R13)
R13_led_column8 "1206, resistor" 1206 693.103,157.901 r90 top value=150 (schematic designator R13)
R14_led_column1 "1206, resistor" 1206 532.248,282.804 r90 top value=150 (schematic designator R14)
R14_led_column2 "1206, resistor" 1206 532.248,299.441 r90 top value=150 (schematic designator R14)
R14_led_column3 "1206, resistor" 1206 532.248,316.408 r90 top value=150 (schematic designator R14)
R14_led_column4 "1206, resistor" 1206 532.248,333.376 r90 top value=150 (schematic designator R14)
R14_led_column5 "1206, resistor" 1206 532.248,350.343 r90 top value=150 (schematic designator R14)
R14_led_column6 "1206, resistor" 1206 532.248,367.31 r90 top value=150 (schematic designator R14)
R14_led_column7 "1206, resistor" 1206 532.248,384.277 r90 top value=150 (schematic designator R14)
R14_led_column8 "1206, resistor" 1206 707.311,157.901 r90 top value=150 (schematic designator R14)
R15_led_column1 "1206, resistor" 1206 535.09,282.804 r90 top value=150 (schematic designator R15)
R15_led_column2 "1206, resistor" 1206 535.09,299.441 r90 top value=150 (schematic designator R15)
R15_led_column3 "1206, resistor" 1206 535.09,316.408 r90 top value=150 (schematic designator R15)
R15_led_column4 "1206, resistor" 1206 535.09,333.376 r90 top value=150 (schematic designator R15)
R15_led_column5 "1206, resistor" 1206 535.09,350.343 r90 top value=150 (schematic designator R15)
R15_led_column6 "1206, resistor" 1206 535.09,367.31 r90 top value=150 (schematic designator R15)
R15_led_column7 "1206, resistor" 1206 535.09,384.277 r90 top value=150 (schematic designator R15)
R15_led_column8 "1206, resistor" 1206 710.153,157.901 r90 top value=150 (schematic designator R15)
R16_led_column1 "1206, resistor" 1206 526.565,282.804 r90 top value=150 (schematic designator R16)
R16_led_column2 "1206, resistor" 1206 526.565,299.441 r90 top value=150 (schematic designator R16)
R16_led_column3 "1206, resistor" 1206 526.565,316.408 r90 top value=150 (schematic designator R16)
R16_led_column4 "1206, resistor" 1206 526.565,333.376 r90 top value=150 (schematic designator R16)
R16_led_column5 "1206, resistor" 1206 526.565,350.343 r90 top value=150 (schematic designator R16)
R16_led_column6 "1206, resistor" 1206 526.565,367.31 r90 top value=150 (schematic designator R16)
R16_led_column7 "1206, resistor" 1206 526.565,384.277 r90 top value=150 (schematic designator R16)
R16_led_column8 "1206, resistor" 1206 701.628,157.901 r90 top value=150 (schematic designator R16)
R17_led_column1 "1206, resistor" 1206 529.407,282.804 r90 top value=150 (schematic designator R17)
R17_led_column2 "1206, resistor" 1206 529.407,299.441 r90 top value=150 (schematic designator R17)
R17_led_column3 "1206, resistor" 1206 529.407,316.408 r90 top value=150 (schematic designator R17)
R17_led_column4 "1206, resistor" 1206 529.407,333.376 r90 top value=150 (schematic designator R17)
R17_led_column5 "1206, resistor" 1206 529.407,350.343 r90 top value=150 (schematic designator R17)
R17_led_column6 "1206, resistor" 1206 529.407,367.31 r90 top value=150 (schematic designator R17)
R17_led_column7 "1206, resistor" 1206 529.407,384.277 r90 top value=150 (schematic designator R17)
R17_led_column8 "1206, resistor" 1206 704.469,157.901 r90 top value=150 (schematic designator R17)
TB4 "Tactile Button" "Button smd" 515.208,149.91 r90 top value="Button SMD"
U1 "ADXL344" lag_16_5by3_3x3mm 554.514,157.2 r0 top
U2_5V_dcdc1 "TPS61201/2" tps61201_2 444.291,189.343 r0 top (schematic designator U2)
U2_5V_dcdc2 "TPS61201/2" tps61201_2 444.291,216.725 r0 top (schematic designator U2)
U2_5V_dcdc3 "TPS61201/2" tps61201_2 444.291,244.106 r0 top (schematic designator U2)
VR1_LDO1 "3.3V Reg" SOT23-5 509.645,257.834 r90 top value=TPS79333DBVR (schematic designator VR1)
VR1_LDO2 "3.3V Reg" SOT23-5 512.515,267.969 r90 top value=TPS79333DBVR (schematic designator VR1)
XT2 "XTAL TXC 7A" XTAL_SMD_LP 523.577,179.704 r90 top value=0

## Footprints (in the part's own frame and the unit in brackets; to place one, negate y for a bottom-side part, rotate by r counter-clockwise, add the part's x,y. Pads: shape width x height; smd on the part's side, far side on the other; paste and mask are expansions set on the pad)
1x2HEADER [mm] "Pad Diameter 2 mm, Hole  1 mm, Pitch 2.54 mm"
  rect 2x2 hole 1: 1(0,0)
  round 2 hole 1: 2(0,-2.54)
  body extent -1.27,-3.81 1.27,1.27, height 5.94
"2x2 PH" [mm] "2.54 mm"
  rect 2x2 hole 1: 1(0,0)
  round 2 hole 1: 2(0,-2.54) 3(2.54,-2.54) 4(2.54,0)
  body extent -1.37,-3.81 3.84,1.27, height 8.51
"2x3 PH" [mm] "2x3 Pin Header, 2.54 pitch"
  rect 2x2 hole 1: 1(0,0)
  round 2 hole 1: 2(2.54,0) 3(5.08,0) 4(5.08,2.54) 5(2.54,2.54) 6(0,2.54)
  body extent -1.26,-1.22 6.36,3.86, height 8.45
"2x8 Pin Header" [mm]
  rect 2x2 hole 1: 1(-17.78,0)
  round 2 hole 1: 2(-15.24,0) 3(-12.7,0) 4(-10.16,0) 5(-7.62,0) 6(-5.08,0) 7(-2.54,0) 8(0,0) 9(0,2.54) 10(-2.54,2.54) 11(-5.08,2.54) 12(-7.62,2.54) 13(-10.16,2.54) 14(-12.7,2.54) 15(-15.24,2.54) 16(-17.78,2.54)
  body extent -19.09,-1.24 1.23,3.72, height 8.54
0805_led [mm]
  rect 1x1.25 smd: 0(-1,0.025) 1(1,0.025)
  body extent -1.03,-0.6 0.99,0.65, height 1.1
1206 [mm] "Generic 1206"
  rect 1.3x1.5 smd: 0(-3.384,-0.003) 1(-0.286,-0.014)
  silkscreen extent -4.37,-1.07 0.71,1.07, body extent -3.46,-0.79 -0.26,0.81
"1206, capasitor" [mm] "Generic 1206"
  rect 1.3x1.5 smd: 0(-3.673,0.038) 1(-0.575,0.026)
  silkscreen extent -4.78,-1.1 0.53,1.2, body extent -3.78,-0.79 -0.58,0.81
"1812, coil" [mm]
  rect 2x4 smd: 1(-2.385,0) 2(2.385,0)
  body extent -2.3,-1.6 2.3,1.6, height 2.6
Atmel_JTAG [mm]
  round 2 hole 1: 1(0.028,-0.01) 2(0.028,2.53) 3(2.568,-0.01) 4(2.568,2.53) 5(5.108,-0.01) 6(5.108,2.53) 7(7.648,-0.01) 8(7.648,2.53) 9(10.188,-0.01) 10(10.188,2.53)
  body extent -1.15,-1.36 11.55,3.64, height 8.6
"Banana Conn VCC" [mm] "571-0100"
  round 2.91 hole 1.94: 1(0,0) 1(15.3,0)
  silkscreen extent -2.8,-5.25 18.1,5.25, body extent -3.7,-5.05 20.3,5.65, height 13
"Button smd" [mm]
  rect 1.55x1.3 smd: 1(0,0) 2(0,-4.5) 3(7.95,0.023) 4(7.95,-4.5)
  body extent -0.55,-5.25 8.45,0.75, height 4.3
lag_16_5by3_3x3mm [mm]
  rect 0.8x0.3 smd: 1(-1.275,1) 2(-1.275,0.5) 3(-1.275,0) 4(-1.275,-0.5) 5(-1.275,-1) 9(1.275,-1) 10(1.275,-0.5) 11(1.275,0) 12(1.275,0.5) 13(1.275,1)
  rect 0.3x0.8 smd: 6(-0.5,-1.275) 7(0,-1.275) 8(0.5,-1.275) 14(0.5,1.275) 15(0,1.275) 16(-0.5,1.275)
NEOPIXEL [mm]
  rrect50% 1.8x1.2 smd: 1(-2.45,1.6)
  rect 1.8x1.2 smd: 2(-2.45,0) 3(-2.45,-1.6) 4(2.45,-1.6) 5(2.45,0) 6(2.45,1.6)
  body extent -2.7,-2.5 2.7,2.5, height 1.55
padFour_L [mm] "Pad Diameter 2 mm, Hole  0.3 mm, Pitch 2.54 mm"
  rect 2x2 hole 1: 1(-3.83,0)
  round 2 hole 1: 2(-1.29,0) 3(1.25,0) 4(3.79,0)
  body extent -5.1,-1.42 5.06,1.5, height 8.51
SOT23-5 [mm] "SOT23, 5-Leads, Body 2,90x2,80mm, Pitch 0,95mm, IPC Medium Density"
  rect 0.95x0.6 smd: 1(-1.35,0.95) 2(-1.35,0) 3(-1.35,-0.95) 4(1.35,-0.95) 5(1.35,0.95)
  silkscreen extent -1.47,-1.55 0.5,1.92, body extent -1.25,-1.5 1.25,1.5, height 1.1
tps61201_2 [mm]
  round 2 hole 1: 1(0,-2.54) 2(0,-12.7) 2(17.78,-10.16) 3(17.78,-2.54)
  rect 2x2 hole 1: 1(0,0) 2(0,-10.16) 2(17.78,-7.62) 3(17.78,0)
  silkscreen extent -3.05,-16.95 20.84,5.91, body extent -3.05,-16.96 20.84,5.91, height 6.27
TQFP-44 [mm] "QFP, 44-Leads, Body 10,00x10,00mm, Pitch 0,80mm, IPC Medium Density"
  rect 1.5x0.55 smd: 1(-5.75,4)
  oval 1.5x0.55 smd: 2(-5.75,3.2) 3(-5.75,2.4) 4(-5.75,1.6) 5(-5.75,0.8) 6(-5.75,0) 7(-5.75,-0.8) 8(-5.75,-1.6) 9(-5.75,-2.4) 10(-5.75,-3.2) 11(-5.75,-4) 23(5.75,-4) 24(5.75,-3.2) 25(5.75,-2.4) 26(5.75,-1.6) 27(5.75,-0.8) 28(5.75,0) 29(5.75,0.8) 30(5.75,1.6) 31(5.75,2.4) 32(5.75,3.2) 33(5.75,4)
  oval 0.55x1.5 smd: 12(-4,-5.75) 13(-3.2,-5.75) 14(-2.4,-5.75) 15(-1.6,-5.75) 16(-0.8,-5.75) 17(0,-5.75) 18(0.8,-5.75) 19(1.6,-5.75) 20(2.4,-5.75) 21(3.2,-5.75) 22(4,-5.75) 34(4,5.75) 35(3.2,5.75) 36(2.4,5.75) 37(1.6,5.75) 38(0.8,5.75) 39(0,5.75) 40(-0.8,5.75) 41(-1.6,5.75) 42(-2.4,5.75) 43(-3.2,5.75) 44(-4,5.75)
  silkscreen extent -5.87,-4.6 4.6,4.95, body extent -6,-6 6,6, height 1.1
XTAL_SMD_LP [mm] "Pad 1.7x2.4, Pitch 3.7"
  rrect50% 2.7x2.4 smd: 1(0.02,0) 2(5,0)
  silkscreen extent 0.26,-1.66 4.76,1.62, body extent 0.02,-1.6 5.02,1.6, height 1.35